# EAGLE board box (EAGLE 6.5.0)

No outline drawn. Coordinates in mm, seen from the top.
Copper layers (1*16): Top 0.035mm / dielectric 1.5mm / Bottom 0.035mm
Design rules "default": minimum track width 10mil, minimum drill 24mil, track to track 8mil, track to pad 8mil, pad to pad 8mil, via to via 8mil, smd to smd 8mil, copper to edge 40mil, drill to drill 8mil, minimum pad ring 10mil, minimum via ring 8mil, stop-mask expansion 4mil, vias tented up to drill 0mil, thermal gap 10mil

## Footprints (pad centres in the part's own frame; a part is rotated, then mirrored left to right if it is on the bottom)
FLAT_BNC_RADIALL_R141440000 = smd 6.452 x 4.8: 1 8.255,0

## Placement (x,y rotation side)
E$1  [HAMMOND_1590BB2]  188.59,59.05 90 top
E$2  [PJVS_MUX_V1]  39.37,8.89 0 top
E$3  [BAT9V]  89.53,93.98 180 top
E$4  [FLAT_BNC_RADIALL_R141440000]  95.25,19.05 180 top
E$5  [FLAT_BNC_RADIALL_R141440000]  95.25,38.73 180 top
E$6  [FLAT_BNC_RADIALL_R141574161]  76.2,118.11 270 top
E$7  [FLAT_BNC_RADIALL_R141574161]  57.15,118.11 270 top
E$8  [FLAT_BNC_RADIALL_R141574161]  15.88,22.86 0 top
E$9  [FLAT_BNC_RADIALL_R141574161]  15.88,63.5 0 top
E$10  [HAMMOND_1590B3]  55.88,59.05 90 top

## Library data of the parts
E$1-E$3 E$10 = ohraniceni
E$4-E$9 = civky_trafa